# EAGLE board RPM2 (EAGLE 7.6.0)
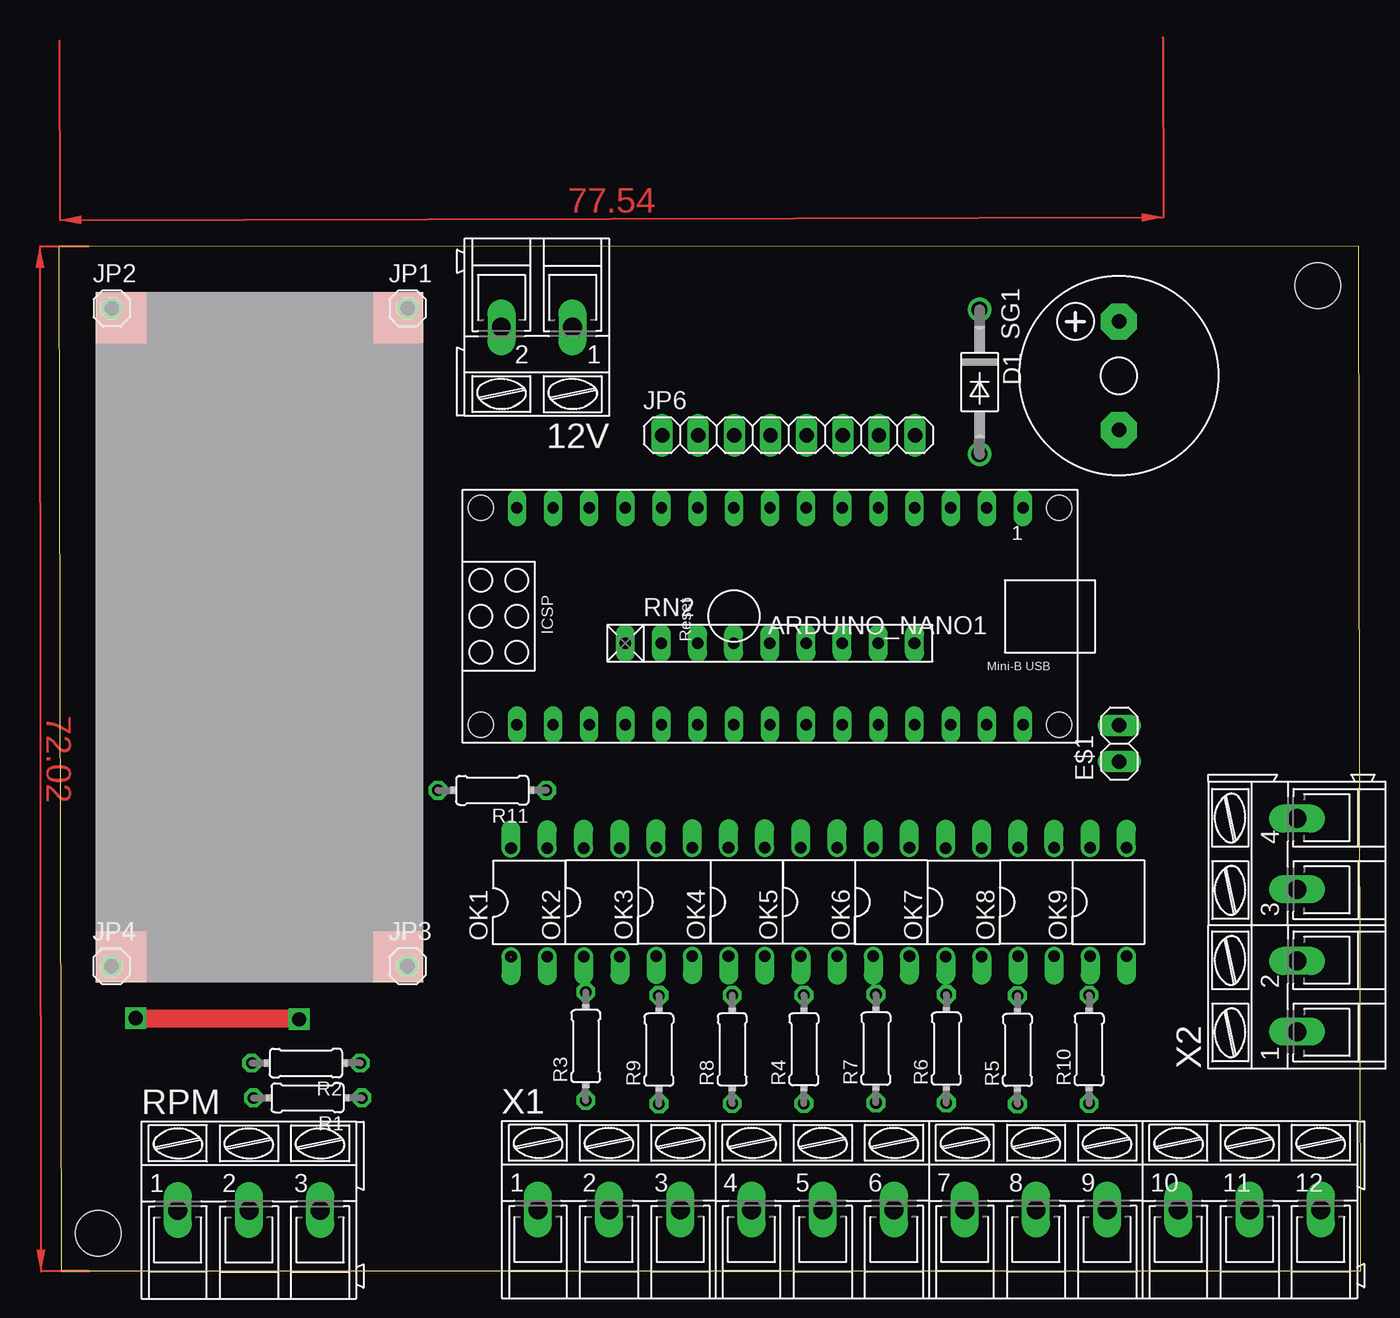
[diagram p0: board, top side]
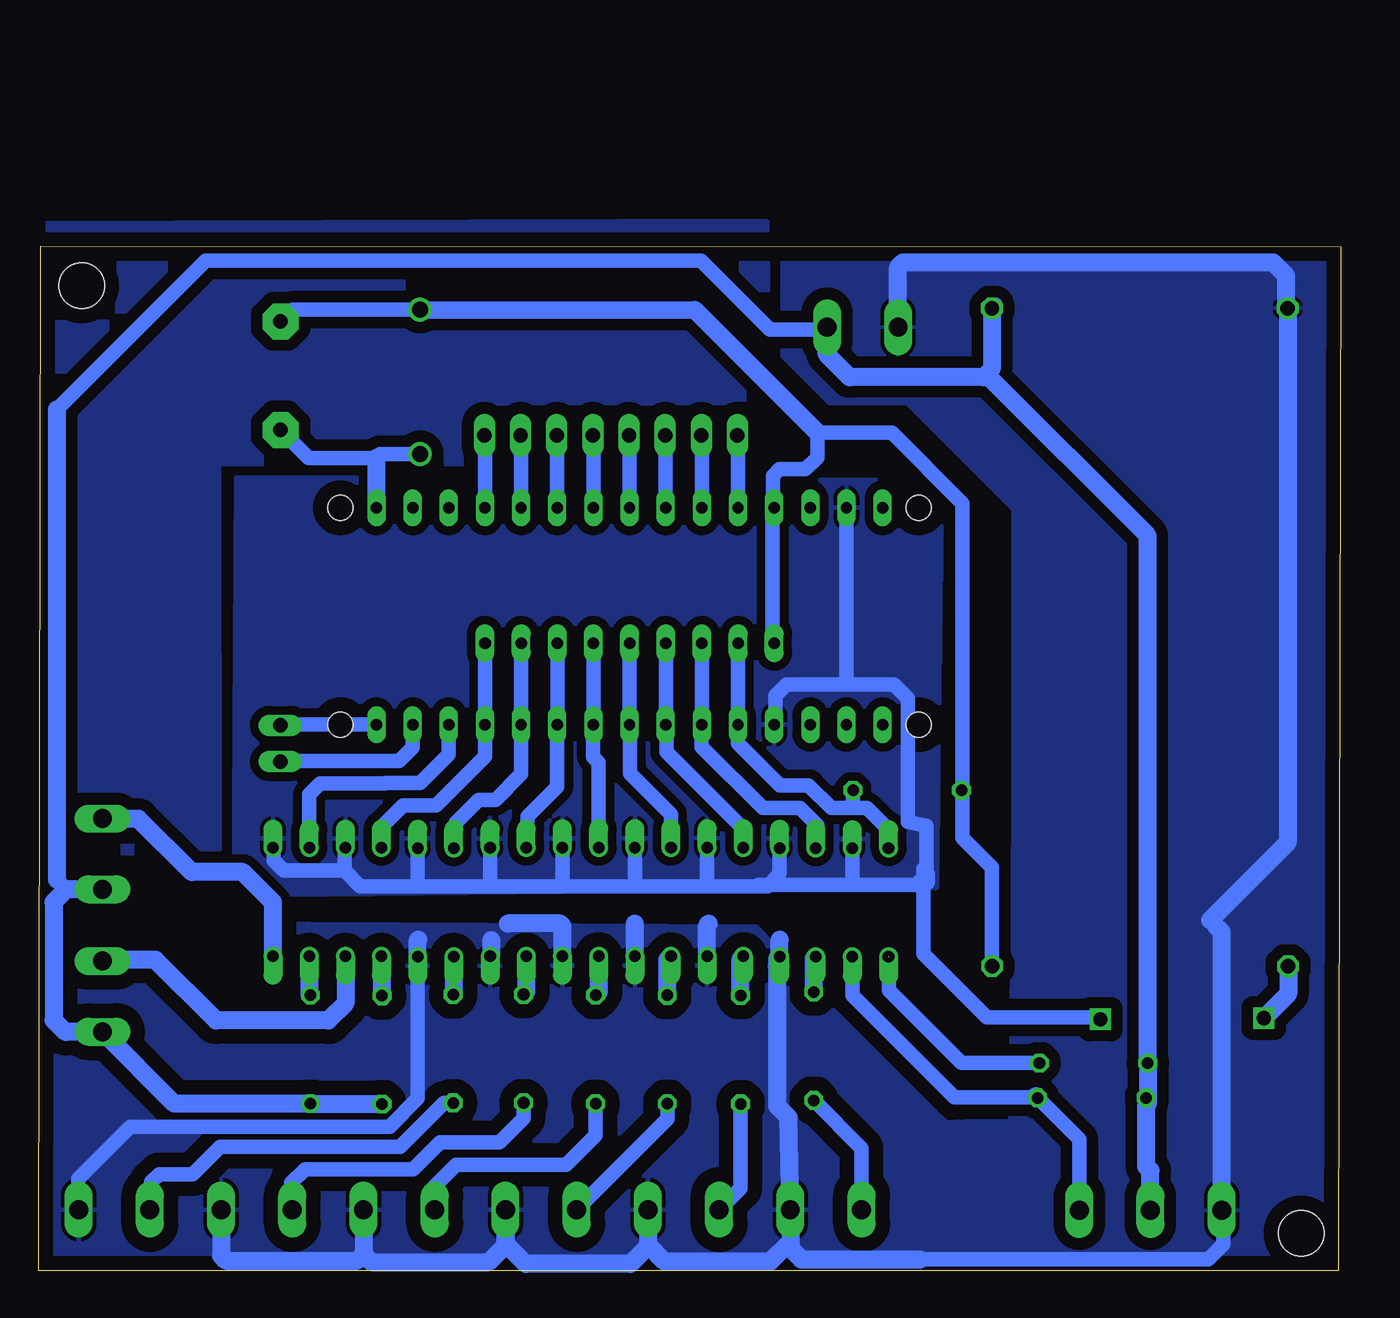
[diagram p1: board, bottom side, seen from below]

Size 91.51 x 72.02 mm. Coordinates in mm from the lower left corner, seen from the top.
Outline: 0.17,0.01 91.51,0 91.34,72.02 0,71.97 0.17,0.01
Copper layers (1*16): Top 0.035mm / dielectric 1.5mm / Bottom 0.035mm
Design rules "default": minimum track width 10mil, minimum drill 24mil, track to track 8mil, track to pad 8mil, pad to pad 8mil, via to via 8mil, smd to smd 8mil, copper to edge 40mil, drill to drill 8mil, minimum pad ring 10mil, minimum via ring 8mil, stop-mask expansion 4mil, vias tented up to drill 0mil, thermal gap 10mil
Holes 3.2 mm at 88.49,69.22 2.79,2.66

## Footprints (pad centres in the part's own frame; a part is rotated, then mirrored left to right if it is on the bottom)
AK300/2 = drill 1.321 long: 1 -2.515,0; 2 2.489,0
ARDUINO_NANO = drill 0.8 long: 1 -20.32,-7.62; 2 -17.78,-7.62; 3 -15.24,-7.62; 4 -12.7,-7.62; 5 -10.16,-7.62; 6 -7.62,-7.62; 7 -5.08,-7.62; 8 -2.54,-7.62; 9 0,-7.62; 10 2.54,-7.62; 11 5.08,-7.62; 12 7.62,-7.62; 13 10.16,-7.62; 14 12.7,-7.62; 15 15.24,-7.62; 16 15.24,7.62; 17 12.7,7.62; 18 10.16,7.62; 19 7.62,7.62; 20 5.08,7.62; 21 2.54,7.62; 22 0,7.62; 23 -2.54,7.62; 24 -5.08,7.62; 25 -7.62,7.62; 26 -10.16,7.62; 27 -12.7,7.62; 28 -15.24,7.62; 29 -17.78,7.62; 30 -20.32,7.62 | hole 1.778: -22.86,-7.62; -22.86,7.62; 17.78,7.62; 17.78,-7.62
DO41-10 = drill 1.118: A 5.08,0; C -5.08,0
1X02 = drill 1.016 long: 1 -1.27,0; 2 1.27,0
1X01 = drill 1.016 octagon: 1 0,0
1X08 = drill 1.016 long: 1 -8.89,0; 2 -6.35,0; 3 -3.81,0; 4 -1.27,0; 5 1.27,0; 6 3.81,0; 7 6.35,0; 8 8.89,0
DIL04 = drill 0.813 offset: 1 -1.27,-3.81; 2 1.27,-3.81; 3 1.27,3.81; 4 -1.27,3.81
0204/7 = drill 0.813 octagon: 1 -3.81,0; 2 3.81,0
RN-9 = drill 0.813 long: 1 -10.16,0; 2 -7.62,0; 3 -5.08,0; 4 -2.54,0; 5 0,0; 6 2.54,0; 7 5.08,0; 8 7.62,0; 9 10.16,0
AK300/3 = drill 1.321 long: 1 -5.004,0; 2 0,0; 3 5.004,0
F/CM12P = drill 1.016 pad 2.54 octagon: + 3.81,0; - -3.81,0
AK300/12 = drill 1.321 long: 1 -27.508,0; 2 -22.504,0; 3 -17.501,0; 4 -12.497,0; 5 -7.493,0; 6 -2.489,0; 7 2.489,0; 8 7.493,0; 9 12.497,0; 10 17.501,0; 11 22.504,0; 12 27.508,0
AK300/4 = drill 1.321 long: 1 -7.493,0; 2 -2.515,0; 3 2.515,0; 4 7.493,0

## Placement (x,y rotation side)
12V  [AK300/2]  33.6,66.31 180 top
ARDUINO_NANO1  [ARDUINO_NANO]  47.44,46.01 180 top
D1  1N4004  [DO41-10]  64.72,62.47 270 top
E$1  [1X02]  74.53,37.07 90 top
JP1  [1X01]  24.52,67.64 0 top
JP2  [1X01]  3.73,67.64 0 top
JP3  [1X01]  24.51,21.42 0 top
JP4  [1X01]  3.71,21.4 0 top
JP6  [1X08]  51.29,58.72 0 top
OK1  PC817  [DIL04]  33.06,25.88 0 top
OK2  PC817  [DIL04]  38.16,25.91 0 top
OK3  PC817  [DIL04]  43.25,25.94 0 top
OK4  PC817  [DIL04]  48.34,25.93 0 top
OK5  PC817  [DIL04]  53.42,25.93 0 top
OK6  PC817  [DIL04]  58.51,25.91 0 top
OK7  PC817  [DIL04]  63.6,25.9 0 top
OK8  PC817  [DIL04]  68.68,25.92 0 top
OK9  PC817  [DIL04]  73.77,25.91 0 top
R1  [0204/7]  17.49,12.15 180 top
R2  [0204/7]  17.37,14.6 180 top
R3  [0204/7]  37.04,15.79 90 top
R4  [0204/7]  52.37,15.57 90 top
R5  [0204/7]  67.38,15.53 90 top
R6  [0204/7]  62.38,15.61 90 top
R7  [0204/7]  57.43,15.62 90 top
R8  [0204/7]  47.33,15.56 90 top
R9  [0204/7]  42.18,15.54 90 top
R10  [0204/7]  72.42,15.56 90 top
R11  [0204/7]  30.47,33.77 180 top
RN2  [RN-9]  49.98,44.1 0 top
RPM  [AK300/3]  13.38,4.27 0 top
SG1  F/CM12P  [F/CM12P]  74.5,62.91 90 top
X1  [AK300/12]  61.19,4.3 0 top
X2  [AK300/4]  87.02,24.29 90 top

## Library data of the parts
12V RPM X1 X2 = con-ptr500; OC_FARNELL: unknown; OC_NEWARK: unknown
ARDUINO_NANO1 = ArduinoNanoV30
D1 = diode
E$1 JP1-JP4 JP6 = pinhead
OK1-OK9 = optocoupler; MPN: PC817X4J000F; OC_FARNELL: 9707727; OC_NEWARK: 97K7059
R1 R5 R10 = rcl
R2-R4 R6-R9 R11 = resistor
RN2 = resistor-net; OC_FARNELL: unknown; OC_NEWARK: unknown
SG1 = buzzer; OC_FARNELL: unknown; OC_NEWARK: unknown

## Nets
GND: ARDUINO_NANO1.14 ARDUINO_NANO1.19 JP4.1 OK1.3 OK2.3 OK3.3 OK4.3 OK5.3 OK6.3 OK7.3 OK8.3 OK9.3
N$1: ARDUINO_NANO1.20 OK1.4 R11.1 RN2.2
N$2: OK1.1 R2.1
N$5: OK2.1 R3.2
N$6: OK3.1 R9.2
N$7: OK4.1 R8.2
N$8: OK5.1 R4.2
N$9: OK6.1 R7.2
N$10: OK7.1 R6.2
N$11: R7.1 X1.9
N$12: ARDUINO_NANO1.29 E$1.1
N$13: R4.1 X1.7
N$15: R3.1 X1.1
N$16: R9.1 X1.3
N$17: ARDUINO_NANO1.30 E$1.2
N$18: ARDUINO_NANO1.11 JP6.1
N$21: R8.1 X1.5
N$22: ARDUINO_NANO1.10 JP6.2
N$23: ARDUINO_NANO1.21 OK2.4 RN2.3
N$24: ARDUINO_NANO1.22 OK3.4 RN2.4
N$25: ARDUINO_NANO1.23 OK4.4 RN2.5
N$26: ARDUINO_NANO1.24 OK5.4 RN2.6
N$27: ARDUINO_NANO1.25 OK6.4 RN2.7
N$28: ARDUINO_NANO1.26 OK7.4 RN2.8
N$29: ARDUINO_NANO1.9 JP6.3
N$30: ARDUINO_NANO1.27 OK8.4 RN2.9
N$31: ARDUINO_NANO1.1 D1.A SG1.-
N$32: ARDUINO_NANO1.8 JP6.4
N$33: ARDUINO_NANO1.7 JP6.5
N$34: ARDUINO_NANO1.6 JP6.6
N$35: ARDUINO_NANO1.5 JP6.7
N$36: ARDUINO_NANO1.4 JP6.8
N$38: OK9.1 R10.2
N$39: OK8.1 R5.2
N$40: R6.1 X1.11
N$41: 12V.2 JP2.1 OK2.2 OK3.2 OK4.2 OK5.2 OK6.2 OK7.2 RPM.1 X1.2 X1.4 X1.6 X1.8 X1.10 X1.12
N$42: 12V.1 JP1.1 R1.2 R2.2 R5.1 R10.1 RPM.2 X2.1 X2.3
N$43: OK8.2 X2.2
N$45: OK9.2 X2.4
S$1: ARDUINO_NANO1.28 OK9.4
SIGNAL: OK1.2 R1.1 RPM.3
VCC: ARDUINO_NANO1.12 D1.C JP3.1 R11.2 RN2.1 SG1.+
VIN: ARDUINO_NANO1.15

## Tracks (layer width: path | path; a pad name or v marks a point on that pad's centre or on a via)
GND  (via drill 1)
  Top 1.27: v5.41,17.76 16.82,17.76 v16.89,17.68
  Bottom 1.016: 34.93,41.21 31.4,41.21 30.42,40.22 30.42,31.55 29.11,31.26 29.11,28.48 | ARDUINO_NANO1.19 39.72,38.49 39.72,40.43 38.94,41.21 34.93,41.21 | ARDUINO_NANO1.14 34.74,41.39 34.93,41.21 | OK2.3 39.43,27.89 40.3,27.02 41,27.02 | 41,27.02 44.69,27.02 | 44.69,27.02 49.65,27.02 | 49.65,27.02 54.84,27.02 | 54.84,27.02 59.75,27.02 | 59.75,27.02 65.17,27.02 | 65.17,27.02 68.92,27.02 70.02,28.13 | OK8.3 70.02,29.66 70.02,28.13 | OK7.3 64.87,27.32 65.17,27.02 | OK6.3 59.78,27.05 59.75,27.02 | OK5.3 54.7,27.17 54.84,27.02 | OK4.3 49.61,27.06 49.65,27.02 | OK3.3 44.52,27.19 44.69,27.02 | 34.34,27.11 29.87,27.11 29.14,27.85 | 34.34,27.11 40.91,27.11 41,27.02 | 29.11,28.48 29.11,27.37 29.14,27.34 | OK1.3 34.33,27.12 34.34,27.11 | OK9.3 75.01,29.73 75.01,28.85 74.3,28.14 70.04,28.14 70.02,28.13 | 16.88,17.81 24.88,17.81 29.34,22.28 29.34,28.24 29.11,28.48
  Bottom 1.27: JP4.1 3.71,19.46 v5.41,17.76 | v16.89,17.68 16.89,17.8 16.88,17.81 | 29.14,27.34 29.14,27.85
  pour Bottom (isolate 0.61): 77.79,26.39 28.37,26.9 28.02,55.57 77.62,55.77
N$1
  Bottom 1.016: 31.79,30.83 OK1.4 31.93,29.84 31.82,31.05 33.29,32.52 34.23,32.52 | RN2.2 ARDUINO_NANO1.20 42.36,37.06 39.43,34.12 37.41,34.12 35.8,32.52 34.23,32.52 | R11.1 34.28,32.57 34.23,32.52
N$2  (1 unrouted)
  Bottom 1.016: R2.1 26.65,14.6 31.77,19.73 31.77,22.06
N$5
  Bottom 1.27: R3.2 37.04,21.95 OK2.1
N$6
  Bottom 1.27: R9.2 42.18,21.93 OK3.1
N$7
  Bottom 1.27: R8.2 47.33,21.86 OK4.1
N$8
  Bottom 1.27: OK5.1 52.16,19.59 R4.2
N$9
  Bottom 1.27: OK6.1 57.24,19.62 R7.2
N$10
  Bottom 1.27: OK7.1 62.33,19.47 R6.2
N$11
  Bottom 1.016: X1.9 73.75,4.36 73.75,6.17 72.77,7.15 65.18,7.15 63.28,9.04 59.11,9.04 57.43,10.72 R7.1
N$12
  Bottom 1.016: ARDUINO_NANO1.29 65.22,36.79 66.19,35.82 74.5,35.82 E$1.1
N$13
  Bottom 1.016: X1.7 63.82,4.44 63.82,5.79 62.17,7.44 54.46,7.44 52.37,9.53 R4.1
N$15
  Bottom 1.016: X1.1 33.68,8.62 R3.1
N$16
  Bottom 1.016: R9.1 42.18,5.81 X1.3
N$17
  Bottom 1.016: ARDUINO_NANO1.30 74.48,38.39 E$1.2
N$18
  Bottom 1.016: ARDUINO_NANO1.11 42.36,58.69 JP6.1
N$21
  Bottom 1.016: R8.1 47.33,10.67 X1.5
N$22
  Bottom 1.016: ARDUINO_NANO1.10 44.9,58.69 JP6.2
N$23
  Bottom 1.016: 44.86,38.43 ARDUINO_NANO1.21 44.9,38.94 | RN2.3 44.9,38.94 | OK2.4 36.78,31.29 38,32.52 40.62,32.52 44.92,36.83 44.92,38.91 44.9,38.94
N$24
  Bottom 1.016: 47.4,38.43 ARDUINO_NANO1.22 | RN2.4 ARDUINO_NANO1.22 | OK3.4 41.98,31.07 47.39,36.47 47.39,38.33 ARDUINO_NANO1.22
N$25
  Bottom 1.016: 49.94,38.43 ARDUINO_NANO1.23 | ARDUINO_NANO1.23 49.95,38.35 49.95,34.95 47.07,32.08 OK4.4 | RN2.5 ARDUINO_NANO1.23
N$26
  Bottom 1.016: RN2.6 ARDUINO_NANO1.24 52.54,38.37 52.54,36.11 52.16,35.73 OK5.4
N$27
  Bottom 1.016: 55.02,38.43 ARDUINO_NANO1.25 | ARDUINO_NANO1.25 55.06,34.02 57.14,31.94 OK6.4 | RN2.7 ARDUINO_NANO1.25
N$28
  Bottom 1.016: 57.56,38.43 ARDUINO_NANO1.26 | ARDUINO_NANO1.26 57.6,34.92 59.41,33.11 60.6,33.11 62.22,31.49 OK7.4 | RN2.8 ARDUINO_NANO1.26
N$29
  Bottom 1.016: ARDUINO_NANO1.9 47.44,58.69 JP6.3
N$30
  Bottom 1.016: 60.1,38.43 ARDUINO_NANO1.27 | OK8.4 67.38,29.76 67.38,31.24 65.91,32.72 63.56,32.72 60.14,36.14 ARDUINO_NANO1.27 | RN2.9 ARDUINO_NANO1.27
N$31
  Bottom 1.016: D1.A 67.51,57.39 67.76,57.14 72.55,57.14 SG1.-
  Bottom 1.27: ARDUINO_NANO1.1 67.76,57.14
N$32
  Bottom 1.016: ARDUINO_NANO1.8 49.98,58.69 JP6.4
N$33
  Bottom 1.016: ARDUINO_NANO1.7 52.52,58.69 JP6.5
N$34
  Bottom 1.016: ARDUINO_NANO1.6 55.06,58.69 JP6.6
N$35
  Bottom 1.016: ARDUINO_NANO1.5 57.6,58.69 JP6.7
N$36
  Bottom 1.016: ARDUINO_NANO1.4 60.14,58.69 JP6.8
N$38
  Bottom 1.27: OK9.1 72.5,19.45 R10.2
N$39
  Bottom 1.27: OK8.1 67.41,19.37 R5.2
N$40
  Bottom 1.016: R6.1 63,11.8 66.09,8.71 78.77,8.71 80.67,6.8 83.05,6.8 83.59,6.26 83.59,4.41 X1.11
N$41
  Bottom 1.016: OK7.2 64.87,12.11 66.86,10.13 85.06,10.13 88.73,6.45 88.73,4.34 X1.12 | 8.77,24.24 9.18,24.65 | 29.56,0.81 9.29,0.81 8.25,1.86 8.25,4.15 RPM.1
  Bottom 1.27: 12V.2 31.11,70.53 30.76,70.88 4.78,70.88 3.86,69.96 3.86,67.78 JP2.1 3.73,30.1 9.18,24.65 | RPM.1 8.37,23.84 8.77,24.24 | 39.43,23.27 OK2.2 39.59,21.94 39.59,11.58 38.8,10.79 X1.2 | 58.53,24.42 54.85,24.42 54.7,24.26 OK5.2 | 59.71,23.24 59.71,22.18 OK6.2 | OK3.2 44.52,24.31 44.42,24.42 | OK4.2 49.61,24.4 49.63,24.42 | X1.2 38.69,1.6 37.9,0.81 29.56,0.81 | X1.2 38.69,2.06 40.1,0.65 47.51,0.65 48.66,1.8 48.66,4.27 X1.4 48.69,1.71 49.92,0.48 57.28,0.48 58.71,1.91 X1.6 58.7,1.81 59.89,0.61 68.13,0.61 68.68,1.17 | X1.8 68.68,1.17 | X1.10 78.69,1.06 78.35,0.72 69.13,0.72 68.68,1.17 | OK7.2 64.87,23.23 64.82,23.28
  pour Bottom (isolate 0.813): 39.28,71.93 39.28,64.23 35.98,60.94 30.51,60.94 23.06,53.48 23.06,31.02 23.11,26.4 23.33,0.06 9.6,-0.21 7.89,-0.14 0.15,0.1 0.1,72.2 2.33,71.97 39.35,71.97
  pour Bottom (isolate 1.016): 91.25,24.49 41.08,24.2 27.72,10.43 23.07,10.69 22.88,0.24 91.22,0.69
N$42
  Bottom 1.016: 72.38,11.71 R10.1 | 89.56,16.8 89.6,16.76 | 24.28,67.89 JP1.1 | 12V.1 36.29,66.14 40.11,66.14 44.95,70.98 79.78,70.98 90.2,60.56 | 89.57,26.81 89.57,26.86 90.2,27.49
  Bottom 1.27: 89.6,16.76 90.45,17.62 90.45,25.92 89.57,26.81 X2.3 | R5.1 72.38,11.71 | R10.1 81.98,11.75 X2.1 89.56,16.8 | 12V.1 36.14,66.28 36.14,64.43 34.51,62.8 25.1,62.8 24.9,63 | JP1.1 24.52,63.38 24.9,63 | 24.9,63 13.56,51.66 R2.2 13.56,11.71 13.68,11.59 | 13.56,12.27 R1.2 13.68,11.59 | 13.68,11.59 13.68,7.34 13.38,7.04 RPM.2 | 90.2,27.49 90.2,60.56
N$43
  Bottom 1.016: 86.94,21.86 X2.2
  Bottom 1.27: OK8.2 69.95,18.8 71.16,17.59 79.05,17.59 83.31,21.86 86.94,21.86
N$45
  Bottom 1.27: X2.4 87.01,31.77 84.5,31.77 80.75,28.02 77.16,28.02 75.03,25.9 OK9.2
S$1
  Bottom 1.016: ARDUINO_NANO1.28 62.68,36.29 64.69,34.28 67.16,34.28 67.17,34.27 71.71,34.27 72.5,33.48 OK9.4
S$2
  pour Bottom (isolate 0.813): 40.81,57.06 79.18,57.06 79.12,29.73 92.56,29.73 92.56,32.36 92.24,32.36 92.24,73.26 40.55,73.44
SIGNAL
  Bottom 1.016: RPM.3 18.38,9.23 R1.1 21.33,12.18 27.14,12.18 34.33,19.37 OK1.2
  Bottom 1.27: 21.42,12.28 R1.1
VCC
  Bottom 1.016: JP3.1 24.51,28.34 26.58,30.42 26.58,33.71 | 26.58,33.71 26.58,53.94 31.55,58.91 36.78,58.91 36.78,57.17 37.61,56.34 39.43,56.34 39.91,55.87 39.91,53.71 ARDUINO_NANO1.12 | ARDUINO_NANO1.12 39.93,53.52 39.93,44.21 RN2.1 | 39.85,53.66 ARDUINO_NANO1.12 | R11.2 26.64,33.77 26.58,33.71 | D1.C 73.67,67.55 SG1.+
  Bottom 1.27: D1.C 45.4,67.52 36.78,58.91
(copper drawn outside any net)
  shapes: Top area x6